# Altium PCB LineFollowerSensor_PCB.PcbDoc
Units mm, origin at the board's own origin, x right, y up, seen from the top; angles counter-clockwise.
Board outline 255.27 x 38.1 mm, 2 copper layers (Top Layer, Bottom Layer); 82 components, 80 nets, 345 pads, 23 vias.
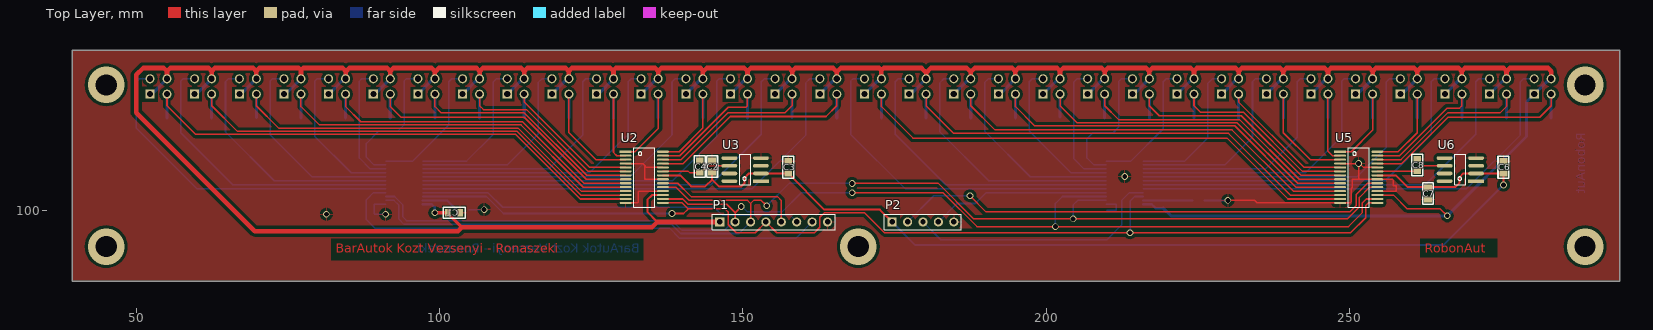
[diagram p0: Top Layer view]
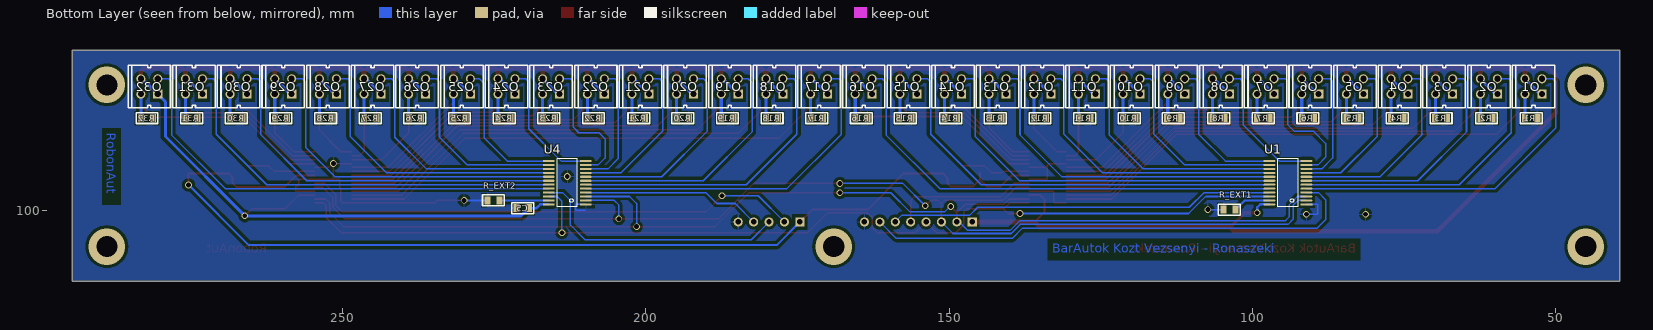
[diagram p1: Bottom Layer view, seen from below]
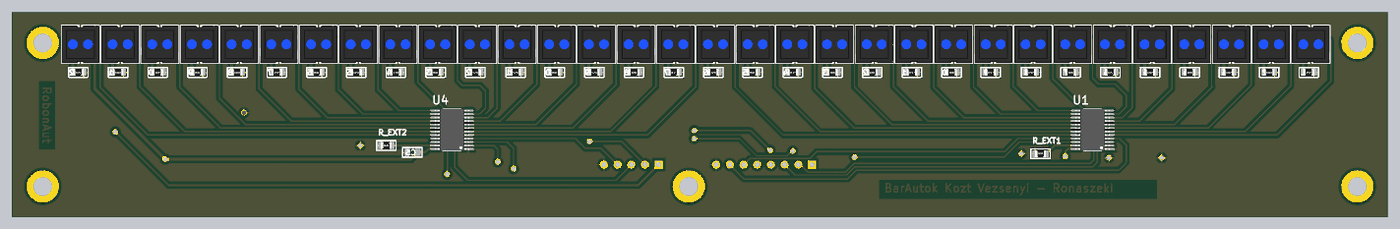
[diagram p2: 3D render of the assembled board from below, using the file's embedded part models]

## Layer stack, top to bottom
Top Layer: signal copper 0.0356
Dielectric: dielectric 0.32, FR-4, Dk 4.8
Bottom Layer: signal copper 0.0356

## Board outline
39.37,126.365 294.64,126.365 294.64,88.265 39.37,88.265

## Design rules (kind name [scope] priority, off if disabled: settings)
Clearance Clearance_polygon [Inpoly] p1: gap=0.5
Clearance [All] p2: gap=0.254
HoleSize [All] p1: absolutevalues=TRUE maxlimit=10 minlimit=0.7 maxpercent=80.000 minpercent=20.000
MinimumSolderMaskSliver [All] p1: minsoldermaskwidth=0.05
PolygonConnect [All] p1: connectstyle=Relief reliefconductorwidth=0.254 reliefentries=4 polygonreliefangle="90 Angle"
RoutingVias [All] p1: holewidth=0.8 width=1.1 viastyle="Through Hole" minholewidth=0.711 minwidth=1.1 maxholewidth=8 maxwidth=10
SilkscreenOverComponentPads [All] p1 off: minsilkscreentomaskgap=0.254
SolderMaskExpansion [All] p1: expansion=0.102
Width [All] p1: maxlimit=1 minlimit=0.25 preferedwidth=0.254 minimp=50.000000 maximp=50.000000 favimp=50.000000
25 further rules are at their usual default settings.

## Classes and differential pairs
net class SENSE_B[1..16]: SENSE_B1 SENSE_B2 SENSE_B3 SENSE_B4 SENSE_B5 SENSE_B6 SENSE_B7 SENSE_B8 SENSE_B9 SENSE_B10 SENSE_B11 SENSE_B12 SENSE_B13 SENSE_B14 SENSE_B15 SENSE_B16
net class SENSE_A[1..16]: SENSE_A1 SENSE_A2 SENSE_A3 SENSE_A4 SENSE_A5 SENSE_A6 SENSE_A7 SENSE_A8 SENSE_A9 SENSE_A10 SENSE_A11 SENSE_A12 SENSE_A13 SENSE_A14 SENSE_A15 SENSE_A16
net class LED_B[1..16]: LED_B1 LED_B2 LED_B3 LED_B4 LED_B5 LED_B6 LED_B7 LED_B8 LED_B9 LED_B10 LED_B11 LED_B12 LED_B13 LED_B14 LED_B15 LED_B16
net class LED_A[1..16]: LED_A1 LED_A2 LED_A3 LED_A4 LED_A5 LED_A6 LED_A7 LED_A8 LED_A9 LED_A10 LED_A11 LED_A12 LED_A13 LED_A14 LED_A15 LED_A16

## Components (designator, comment, footprint, x,y, rotation, side; value= is the part's Value field where it differs from the comment)
C1 "100nF" FP_0805_CAP_085 102.362,99.568 r180 top
C2 "100nF" FP_0805_CAP_085 144.907,107.188 r270 top
C3 "100nF" FP_0805_CAP_085 157.48,107.061 r270 top
C4 "100nF" FP_0805_CAP_085 142.875,107.188 r270 top
C5 "100nF" FP_0805_CAP_085 220.345,100.33 r180 bottom
C6 "100nF" FP_0805_CAP_085 275.463,107.061 r270 top
C7 "100nF" FP_0805_CAP_085 263.017,102.743 r90 top
C8 "100nF" FP_0805_CAP_085 261.239,107.442 r270 top
O1 "CNY70" FP_CNY70 53.594,120.396 r0 bottom
O2 "CNY70" FP_CNY70 60.96,120.396 r0 bottom
O3 "CNY70" FP_CNY70 68.326,120.396 r0 bottom
O4 "CNY70" FP_CNY70 75.692,120.396 r0 bottom
O5 "CNY70" FP_CNY70 83.058,120.396 r0 bottom
O6 "CNY70" FP_CNY70 90.424,120.396 r0 bottom
O7 "CNY70" FP_CNY70 97.79,120.396 r0 bottom
O8 "CNY70" FP_CNY70 105.156,120.396 r0 bottom
O9 "CNY70" FP_CNY70 112.522,120.396 r0 bottom
O10 "CNY70" FP_CNY70 119.888,120.396 r0 bottom
O11 "CNY70" FP_CNY70 127.254,120.396 r0 bottom
O12 "CNY70" FP_CNY70 134.62,120.396 r0 bottom
O13 "CNY70" FP_CNY70 141.986,120.396 r0 bottom
O14 "CNY70" FP_CNY70 149.352,120.396 r0 bottom
O15 "CNY70" FP_CNY70 156.718,120.396 r0 bottom
O16 "CNY70" FP_CNY70 164.084,120.396 r0 bottom
O17 "CNY70" FP_CNY70 171.45,120.396 r0 bottom
O18 "CNY70" FP_CNY70 178.816,120.396 r0 bottom
O19 "CNY70" FP_CNY70 186.182,120.396 r0 bottom
O20 "CNY70" FP_CNY70 193.548,120.396 r0 bottom
O21 "CNY70" FP_CNY70 200.914,120.396 r0 bottom
O22 "CNY70" FP_CNY70 208.28,120.396 r0 bottom
O23 "CNY70" FP_CNY70 215.646,120.396 r0 bottom
O24 "CNY70" FP_CNY70 223.012,120.396 r0 bottom
O25 "CNY70" FP_CNY70 230.378,120.396 r0 bottom
O26 "CNY70" FP_CNY70 237.744,120.396 r0 bottom
O27 "CNY70" FP_CNY70 245.11,120.396 r0 bottom
O28 "CNY70" FP_CNY70 252.476,120.396 r0 bottom
O29 "CNY70" FP_CNY70 259.842,120.396 r0 bottom
O30 "CNY70" FP_CNY70 267.208,120.396 r0 bottom
O31 "CNY70" FP_CNY70 274.574,120.396 r0 bottom
O32 "CNY70" FP_CNY70 281.94,120.396 r0 bottom
P1 "Header 8" HDR1X8 146.177,98.044 r0 top
P2 "Header 5" HDR1X5 174.625,98.044 r0 top
R1 "10K" FP_0805_RES 53.975,115.189 r180 bottom
R2 "10K" FP_0805_RES 61.341,115.189 r0 bottom
R3 "10K" FP_0805_RES 68.834,115.189 r0 bottom
R4 "10K" FP_0805_RES 76.073,115.189 r0 bottom
R5 "10K" FP_0805_RES 83.439,115.189 r0 bottom
R6 "10K" FP_0805_RES 90.805,115.189 r0 bottom
R7 "10K" FP_0805_RES 98.171,115.189 r0 bottom
R8 "10K" FP_0805_RES 105.537,115.189 r0 bottom
R9 "10K" FP_0805_RES 113.03,115.189 r0 bottom
R10 "10K" FP_0805_RES 120.269,115.189 r0 bottom
R11 "10K" FP_0805_RES 127.635,115.189 r0 bottom
R12 "10K" FP_0805_RES 135.001,115.189 r0 bottom
R13 "10K" FP_0805_RES 142.367,115.189 r0 bottom
R14 "10K" FP_0805_RES 149.733,115.189 r0 bottom
R15 "10K" FP_0805_RES 157.226,115.189 r0 bottom
R16 "10K" FP_0805_RES 164.465,115.189 r0 bottom
R17 "10K" FP_0805_RES 171.831,115.189 r180 bottom
R18 "10K" FP_0805_RES 179.197,115.189 r0 bottom
R19 "10K" FP_0805_RES 186.563,115.189 r0 bottom
R20 "10K" FP_0805_RES 193.929,115.189 r0 bottom
R21 "10K" FP_0805_RES 201.168,115.189 r0 bottom
R22 "10K" FP_0805_RES 208.661,115.189 r0 bottom
R23 "10K" FP_0805_RES 216.027,115.189 r0 bottom
R24 "10K" FP_0805_RES 223.393,115.189 r0 bottom
R25 "10K" FP_0805_RES 230.759,115.189 r0 bottom
R26 "10K" FP_0805_RES 238.125,115.189 r0 bottom
R27 "10K" FP_0805_RES 245.491,115.189 r0 bottom
R28 "10K" FP_0805_RES 252.857,115.189 r0 bottom
R29 "10K" FP_0805_RES 260.223,115.189 r0 bottom
R30 "10K" FP_0805_RES 267.589,115.189 r0 bottom
R31 "10K" FP_0805_RES 274.955,115.189 r0 bottom
R32 "10K" FP_0805_RES 282.321,115.189 r0 bottom
R_EXT1 "1R5" FP_0805_RES 103.759,100.076 r180 bottom
R_EXT2 "1R5" FP_0805_RES 225.171,101.6 r180 bottom
U1 "STP16CP05" TSSOP24 94.107,104.521 r0 bottom
U2 "AD7490" TSSOP28 133.731,105.41 r0 top
U3 "ADR421" SOIC8 150.368,106.68 r180 top
U4 "STP16CP05" TSSOP24 212.979,104.521 r0 bottom
U5 "AD7490" TSSOP28 251.587,105.41 r0 top
U6 "ADR421" SOIC8 268.351,106.68 r180 top

## Footprints (in the part's own frame and the unit in brackets; to place one, negate y for a bottom-side part, rotate by r counter-clockwise, add the part's x,y. Pads: shape width x height; smd on the part's side, far side on the other; paste and mask are expansions set on the pad)
FP_0805_CAP_085 [mm] "0805 kapacitás YAGEO 0.85mm magas"
  rect 1x1.3 smd: 1(-1,0) 2(1,0)
  silkscreen extent -1.8,-0.9 1.8,0.9, body extent -1,-0.64 1.03,0.64, height 0.85
FP_0805_RES [mm] "0805 ellenállás"
  rect 1x1.3 smd: 1(-1,0) 2(1,0)
  silkscreen extent -1.8,-0.9 1.8,0.9, body extent -1,-0.62 1,0.63, height 0.62
FP_CNY70 [mm] "Optoérzékelõ"
  rect 1.5x1.5 hole 1: A(-1.4,1.27)
  round 1.5 hole 1: C(1.4,-1.27) E(1.4,1.27) K(-1.4,-1.27)
  silkscreen extent -3.5,-3.5 3.5,3.5, body extent -3.5,-3.5 3.5,3.5, height 6
HDR1X5 [mm] "Connector; Header; 5 Position"
  rect 1.5x1.5 hole 0.9: 1(0,0)
  round 1.5 hole 0.9: 2(2.54,0) 3(5.08,0) 4(7.62,0) 5(10.16,0)
  silkscreen extent -1.27,-1.27 11.43,1.27
HDR1X8 [mm] "Connector; Header; 8 Position"
  rect 1.5x1.5 hole 0.9: 1(0,0)
  round 1.5 hole 0.9: 2(2.54,0) 3(5.08,0) 4(7.62,0) 5(10.16,0) 6(12.7,0) 7(15.24,0) 8(17.78,0)
  silkscreen extent -1.27,-1.27 19.05,1.27
SOIC8 [mm] "SOIC, 8-Leads, Body 5,0x4,0mm (max), Pitch 1,27mm, IPC Medium Density"
  rect 2.6x0.6 smd: 1(-2.6,1.905)
  oval 2.6x0.6 smd: 2(-2.6,0.635) 3(-2.6,-0.635) 4(-2.6,-1.905) 5(2.6,-1.905) 6(2.6,-0.635) 7(2.6,0.635) 8(2.6,1.905)
  silkscreen extent -0.9,-2.5 0.9,2.5, body extent -3.01,-2.5 3.01,2.5, height 1.75
TSSOP24 [mm] "TSOP, 24-Leads, Body 7,9x4,5mm (max), Pitch 0,65mm, IPC Medium Density"
  rect 1.95x0.35 smd: 1(-3.05,3.575)
  oval 1.95x0.35 smd: 2(-3.05,2.925) 3(-3.05,2.275) 4(-3.05,1.625) 5(-3.05,0.975) 6(-3.05,0.325) 7(-3.05,-0.325) 8(-3.05,-0.975) 9(-3.05,-1.625) 10(-3.05,-2.275) 11(-3.05,-2.925) 12(-3.05,-3.575) 13(3.05,-3.575) 14(3.05,-2.925) 15(3.05,-2.275) 16(3.05,-1.625) 17(3.05,-0.975) 18(3.05,-0.325) 19(3.05,0.325) 20(3.05,0.975) 21(3.05,1.625) 22(3.05,2.275) 23(3.05,2.925) 24(3.05,3.575)
  silkscreen extent -1.68,-3.95 1.68,3.95, body extent -3.23,-3.95 3.23,3.95, height 1.25
TSSOP28 [mm] "TSOP, 28-Leads, Body 9,8x4,5mm (max), Pitch 0,65mm, IPC Medium Density"
  rect 1.95x0.35 smd: 1(-3.075,4.225)
  oval 1.95x0.35 smd: 2(-3.075,3.575) 3(-3.075,2.925) 4(-3.075,2.275) 5(-3.075,1.625) 6(-3.075,0.975) 7(-3.075,0.325) 8(-3.075,-0.325) 9(-3.075,-0.975) 10(-3.075,-1.625) 11(-3.075,-2.275) 12(-3.075,-2.925) 13(-3.075,-3.575) 14(-3.075,-4.225) 15(3.075,-4.225) 16(3.075,-3.575) 17(3.075,-2.925) 18(3.075,-2.275) 19(3.075,-1.625) 20(3.075,-0.975) 21(3.075,-0.325) 22(3.075,0.325) 23(3.075,0.975) 24(3.075,1.625) 25(3.075,2.275) 26(3.075,2.925) 27(3.075,3.575) 28(3.075,4.225)
  silkscreen extent -1.7,-4.9 1.7,4.9, body extent -3.23,-4.9 3.23,4.9, height 1.35

## Part data
C1 C2 C3 C4 C5 C6 C7 C8: library part CAP_100nF, "YAGEO Ceramic Capacitor"
O1 O2 O3 O4 O5 O6 O7 O8 O9 O10 O11 O12 O13 O14 O15 O16 O17 O18 O19 O20 O21 O22 O23 O24 O25 O26 O27 O28 O29 O30 O31 O32: "Optoérzékelõ, CNY70"
P1: "Header, 8-Pin"
P2: "Header, 5-Pin"
R1 R2 R3 R4 R5 R6 R7 R8 R9 R10 R11 R12 R13 R14 R15 R16 R17 R18 R19 R20 R21 R22 R23 R24 R25 R26 R27 R28 R29 R30 R31 R32: library part RES_10K, "YAGEO SMD RESISTOR"
R_EXT1 R_EXT2: library part RES_1R5, "YAGEO SMD RESISTOR"
U1 U4: "16 channel constant current LED driver"
U2 U5: "16 channel analog digital converter"
U3 U6: "Reference voltage generator"

## Via types
v1: diameter 1.1, hole 0.8, Top Layer to Bottom Layer, 18 vias
v2: diameter 6, hole 3.5, Top Layer to Bottom Layer, 5 vias

## Nets (pads, with @x,y where several pads share a name; then routed paths per layer and width w, separated by ;. In a path a pad name is that pad's centre, name@x,y a point inside that pad or via, vN(x,y) a via of type N, cw(c..) or ccw(c..) an arc to the next point about the centre after c; other vN are vias at no path point)
3V3: C1.2 C5.2 O1.A O1.C O2.A O2.C O3.A O3.C O4.A O4.C O5.A O5.C O6.A O6.C O7.A O7.C O8.A O8.C O9.A O9.C O10.A O10.C O11.A O11.C O12.A O12.C O13.A O13.C O14.A O14.C O15.A O15.C O16.A O16.C O17.A O17.C O18.A O18.C O19.A O19.C O20.A O20.C O21.A O21.C O22.A O22.C O23.A O23.C O24.A O24.C O25.A O25.C O26.A O26.C O27.A O27.C O28.A O28.C O29.A O29.C O30.A O30.C O31.A O31.C O32.A O32.C P1.1 U1.24 U2.17 U4.24 U5.17 | length 630.5
  Top Layer w0.254: U5.17 257.306,102.485 259.588,100.203 265.049,100.203 v1(266.192,99.06)
  Top Layer w0.33: C1.2@101.362,99.425 C1.2 ; 135.89,98.044 134.239,99.695 134.239,101.727 134.997,102.485 U2.17
  Top Layer w0.508: v1(99.187,99.568) C1.2 ; C1.2@101.362,99.425 103.632,97.155
  Top Layer w0.762: O1.C 54.994,122.933 ; O2.C 62.36,122.933 ; O3.C 69.726,122.933 ; O4.C 77.092,123.06 ; O5.C 84.458,122.933 ; O6.C 91.824,122.933 ; O7.C 99.19,122.933 ; O8.C 106.556,122.933 ; O9.C 113.922,122.933 ; O10.C 121.288,122.933 ; O12.C 136.02,122.933 ; P1.1 135.89,98.044 135.001,97.155 103.632,97.155 102.997,96.52 69.469,96.52 49.911,116.078 49.911,122.301 49.914,122.301 51.054,123.441 54.486,123.441 54.994,122.933 ; O14.C 150.752,122.933 ; O15.C 158.118,122.933 ; O16.C 165.484,122.806 ; O17.C 172.85,123.06 ; O18.C 180.216,122.679 ; O19.C 187.582,122.806 ; O20.C 194.948,122.933 ; O21.C 202.314,122.933 ; O22.C 209.68,122.933 ; O23.C 217.046,122.933 ; O24.C 224.412,122.933 ; O25.C 231.778,122.933 ; O26.C 239.144,122.933 ; O27.C 246.51,122.933 ; O28.C 253.876,122.933 ; O29.C 261.242,122.933 ; O30.C 268.608,122.933 ; O31.C 275.974,122.933 ; O32.C 283.34,122.933 282.835,123.438 276.479,123.438 275.974,122.933 ; 54.994,122.933 55.499,123.438 61.855,123.438 62.36,122.933 ; 62.36,122.933 62.865,123.438 69.221,123.438 69.726,122.933 ; 69.726,122.933 70.231,123.438 76.714,123.438 77.092,123.06 ; 77.092,123.06 77.47,123.438 83.953,123.438 84.458,122.933 ; 84.458,122.933 84.579,122.933 85.09,123.444 91.313,123.444 91.824,122.933 ; 91.824,122.933 92.329,123.438 98.685,123.438 99.19,122.933 ; 99.19,122.933 99.311,122.933 99.822,123.444 106.045,123.444 106.556,122.933 ; 106.556,122.933 107.061,123.438 113.417,123.438 113.922,122.933 ; 113.922,122.933 114.427,123.438 120.783,123.438 121.288,122.933 ; 121.288,122.933 121.288,122.939 121.793,123.444 128.143,123.444 128.651,122.936 ; 128.651,122.936 128.651,121.669 O11.C 128.654,122.933 128.651,122.936 ; 128.651,122.936 128.651,123.063 129.032,123.444 135.509,123.444 136.02,122.933 ; 136.02,122.933 136.525,123.438 143.008,123.438 143.386,123.06 143.386,122.812 ; 143.386,122.812 143.383,122.809 143.383,121.669 O13.C 143.386,122.812 ; 143.386,122.812 144.018,123.444 150.241,123.444 150.752,122.933 ; 150.752,122.933 151.263,123.444 157.607,123.444 158.118,122.933 ; 158.118,122.933 158.623,123.438 164.852,123.438 165.484,122.806 ; 165.484,122.806 166.116,123.438 172.472,123.438 172.85,123.06 ; 172.85,123.06 173.234,123.444 179.451,123.444 180.216,122.679 ; 180.216,122.679 180.975,123.438 186.95,123.438 187.582,122.806 ; 187.582,122.806 188.22,123.444 194.437,123.444 194.948,122.933 ; 194.948,122.933 195.453,123.438 201.809,123.438 202.314,122.933 ; 202.314,122.933 202.314,122.939 202.819,123.444 209.169,123.444 209.68,122.933 ; 209.68,122.933 210.185,123.438 216.541,123.438 217.046,122.933 ; 217.046,122.933 217.551,123.438 223.907,123.438 224.412,122.933 ; 224.412,122.933 224.917,123.438 231.273,123.438 231.778,122.933 ; 231.778,122.933 232.283,123.438 238.639,123.438 239.144,122.933 ; 239.144,122.933 239.649,123.438 246.005,123.438 246.51,122.933 ; 246.51,122.933 247.021,123.444 253.365,123.444 253.876,122.933 ; 253.876,122.933 254.381,123.438 260.737,123.438 261.242,122.933 ; 261.242,122.933 261.753,123.444 268.097,123.444 268.608,122.933 ; 268.608,122.933 269.119,123.444 275.463,123.444 275.974,122.933
  Bottom Layer w0.254: U1.24 U1.24@97.176,100.965 ; U4.24 U4.24@216.048,100.965
  Bottom Layer w0.381: U1.24 98.66,100.946 99.149,100.457 v1@99.149,99.606 ; U4.24 217.443,100.946 218.059,100.33 C5.2
  Bottom Layer w0.508: O1.A 52.454,119.126 O1.C ; O2.A 59.82,119.126 O2.C ; O3.A 67.186,119.126 O3.C ; O4.A 74.552,119.126 O4.C ; O5.A O5.C@84.198,121.666 ; O6.A@89.284,119.126 O6.C ; O7.A O7.C@98.93,121.666 ; O8.A O8.C@106.296,121.666 ; O9.A O9.C@113.662,121.666 ; O10.A O10.C@121.028,121.666 ; O11.A@126.114,119.126 O11.C ; O12.A O12.C@135.76,121.666 ; O13.A O13.C@143.126,121.666 ; O14.A O14.C@150.492,121.666 ; O15.A O15.C@157.858,121.666 ; O16.A O16.C@165.224,121.666 ; O17.A O17.C@172.59,121.666 ; O18.A@177.676,119.126 O18.C ; O19.A O19.C@187.322,121.666 ; O20.A@192.408,119.126 O20.C ; O21.A O21.C@202.054,121.666 ; O22.A O22.C@209.42,121.666 ; O23.A@214.506,119.126 O23.C ; C5.2 220.615,99.06 v1(266.192,99.06) 279.273,112.141 279.273,117.859 O32.A O32.C@283.08,121.666 ; O24.A O24.C@224.152,121.666 ; O25.A O25.C@231.518,121.666 ; O26.A O26.C@238.884,121.666 ; O27.A O27.C@246.25,121.666 ; O28.A@251.336,119.126 O28.C ; O29.A@258.702,119.126 O29.C ; O30.A O30.C@268.348,121.666 ; O31.A O31.C@275.714,121.666
  Bottom Layer w0.762: O2.C@62.1,121.666 O2.C ; O5.C@84.198,121.666 O5.C ; O6.A O6.A@89.284,119.126 ; O6.C@91.564,121.666 O6.C ; O7.C@98.93,121.666 O7.C ; O8.C@106.296,121.666 O8.C ; O9.C@113.662,121.666 O9.C ; O10.C@121.028,121.666 O10.C ; O11.A O11.A@126.114,119.126 ; O12.C@135.76,121.666 O12.C ; O13.C@143.126,121.666 O13.C ; O14.C@150.492,121.666 O14.C ; O15.C@157.858,121.666 O15.C ; O16.C@165.224,121.666 O16.C ; O17.C@172.59,121.666 O17.C ; O18.A O18.A@177.676,119.126 ; O19.C@187.322,121.666 O19.C ; O21.C@202.054,121.666 O21.C ; O22.C@209.42,121.666 O22.C ; O23.A O23.A@214.506,119.126 ; O24.C@224.152,121.666 O24.C ; O25.C@231.518,121.666 O25.C ; O26.C@238.884,121.666 O26.C ; O27.C@246.25,121.666 O27.C ; O29.A O29.A@258.702,119.126 ; O30.C@268.348,121.666 O30.C ; O31.C@275.714,121.666 O31.C ; O32.C@283.08,121.666 O32.C
5V: C2.2 C3.2 C6.2 C7.2 P2.1 U2.22 U3.2 U5.22 U6.2 | length 176.9
  Top Layer w0.254: C6.2@275.447,106.045 C6.2
  Top Layer w0.33: U2.22 139.629,105.735 141.462,103.902 143.78,103.902 144.907,105.029 ; C2.2 144.907,105.029 ; C3.2 C3.2@157.464,106.045 ; P2.1 172.593,100.076 163.433,100.076 C3.2@157.464,106.045 ; U5.22 257.683,105.735 259.643,103.775 267.478,103.775 268.224,104.521 268.224,105.41 268.859,106.045 U6.2 275.447,106.045 275.463,106.029 v1(275.463,104.14) ; 144.907,105.029 146.034,103.902 149.749,103.902 150.241,104.394 150.241,105.283 151.003,106.045 U3.2 C3.2@157.464,106.045
  Bottom Layer w0.33: P2.1 178.435,94.234 265.557,94.234 v1(275.463,104.14)
GND: C1.1 C2.1 C3.1 C4.1 C5.1 C6.1 C7.1 C8.1 P1.8 P2.5 R1.2 R2.1 R3.1 R4.1 R5.1 R6.1 R7.1 R8.1 R9.1 R10.1 R11.1 R12.1 R13.1 R14.1 R15.1 R16.1 R17.2 R18.1 R19.1 R20.1 R21.1 R22.1 R23.1 R24.1 R25.1 R26.1 R27.1 R28.1 R29.1 R30.1 R31.1 R32.1 R_EXT1.1 R_EXT2.1 U1.1 U2.4 U2.14 U2.18 U2.21 U2.24 U3.4 U4.1 U5.4 U5.14 U5.18 U5.21 U5.24 U6.4 | length 81.2
  Top Layer w0.254: U2.14 132.554,101.185 132.715,101.346 132.715,102.997 132.853,103.135 U2.18 ; U2.4 133.466,107.685 133.836,107.315 ; U2.21 133.787,105.085 133.787,107.266 133.836,107.315 ; U2.24 134.116,107.035 133.836,107.315 ; v1(229.997,101.6) 234.442,101.6 234.857,101.185 U5.14 250.156,101.185 250.317,101.346 250.317,103.49 250.515,103.688 250.515,105.085 251.714,105.085 ; U5.4 v1(251.576,107.685) ; U5.18 257.81,103.135 257.81,104.013 257.302,104.013 257.302,104.902 257.119,105.085 U5.21 251.714,105.085 ; U5.24 252.375,107.035 251.725,107.685 v1(251.576,107.685) ; v1(251.576,107.685) 251.576,105.223 251.714,105.085
  Bottom Layer w0.254: U1.1 89.173,100.946 89.173,99.422 89.281,99.314 v1(91.059,99.314) ; R_EXT1.1 v1(107.315,100.076) ; U4.1 211.563,100.946 211.563,99.968 210.039,99.968
  Bottom Layer w0.381: R_EXT2.1 v1(229.997,101.6)
  other v1: 81.28,99.314 212.979,105.537
LED_A1: O1.K U1.5 | length 55.4
  Bottom Layer w0.254: O1.K 50.419,121.666 49.911,121.158 49.911,113.538 59.903,103.546 U1.5
LED_A2: O2.K U1.6 | length 48.3
  Bottom Layer w0.254: O2.K 57.658,121.666 57.277,121.285 57.277,112.776 65.857,104.196 U1.6
LED_A3: O3.K U1.7 | length 40.5
  Bottom Layer w0.254: O3.K 65.151,121.666 64.643,121.158 64.643,112.903 72.7,104.846 U1.7
LED_A4: O4.K U1.8 | length 33.3
  Bottom Layer w0.254: 71.882,112.522 78.908,105.496 U1.8 ; 72.009,112.522 72.009,121.285 72.39,121.666 O4.K
LED_A5: O5.K U1.9 | length 25.8
  Bottom Layer w0.254: O5.K 79.756,121.666 79.375,121.285 79.375,112.141 85.37,106.146 U1.9
LED_A6: O6.K U1.10 | length 20.2
  Bottom Layer w0.254: O6.K 87.122,121.666 86.741,121.285 86.741,108.585 88.53,106.796 U1.10
LED_A7: O7.K U1.11 | length 23.1
  Bottom Layer w0.254: U1.11 89.15,107.446 87.884,108.712 87.884,110.998 89.916,113.03 93.091,113.03 94.107,114.046 94.107,121.285 94.488,121.666 O7.K
LED_A8: O8.K U1.12 | length 22.5
  Bottom Layer w0.254: U1.12 95.523,108.096 101.088,113.661 101.096,113.661 101.473,114.039 101.473,121.158 101.981,121.666 O8.K
LED_A9: O9.K U1.13 | length 24.6
  Bottom Layer w0.254: U1.13 101.581,108.096 104.413,108.096 108.839,112.522 108.839,121.158 109.347,121.666 O9.K
LED_A10: O10.K U1.14 | length 32.2
  Bottom Layer w0.254: U1.14 111.129,107.446 116.205,112.522 116.205,115.681 116.205,121.031 116.84,121.666 O10.K
LED_A11: O11.K U1.15 | length 40
  Bottom Layer w0.254: U1.15 117.972,106.796 123.571,112.395 123.571,115.443 123.571,121.158 124.079,121.666 O11.K
LED_A12: O12.K U1.16 | length 47.6
  Bottom Layer w0.254: U1.16 124.688,106.146 131.064,112.522 131.064,115.824 131.064,121.158 131.572,121.666 O12.K
LED_A13: O13.K U1.17 | length 55.2
  Bottom Layer w0.254: U1.17 131.404,105.496 ; 131.445,105.537 138.303,112.395 138.303,121.158 138.811,121.666 O13.K
LED_A14: O14.K U1.18 | length 63.1
  Bottom Layer w0.254: U1.18 138.359,104.846 138.367,104.838 145.669,112.141 145.669,121.285 146.05,121.666 O14.K
LED_A15: O15.K U1.19 | length 70.5
  Bottom Layer w0.254: U1.19 144.709,104.196 153.035,112.522 153.035,115.316 153.035,121.158 153.543,121.666 O15.K
LED_A16: O16.K U1.20 | length 78.3
  Bottom Layer w0.254: U1.20 151.552,103.546 160.401,112.395 160.401,121.031 161.036,121.666 O16.K O16.K@162.557,121.793
LED_B1: O17.K U4.5 | length 57.1
  Bottom Layer w0.254: O17.K 168.148,121.666 167.767,121.285 167.767,112.522 176.743,103.546 U4.5
LED_B2: O18.K U4.6 | length 49.4
  Bottom Layer w0.254: O18.K 175.641,121.666 175.133,121.158 175.133,112.522 183.459,104.196 U4.6
LED_B3: O19.K U4.7 | length 41.4
  Bottom Layer w0.254: O19.K 183.134,121.666 182.499,121.031 182.499,112.903 190.556,104.846 U4.7
LED_B4: O20.K U4.8 | length 33.7
  Bottom Layer w0.254: O20.K 190.5,121.666 189.865,121.031 189.865,113.03 197.399,105.496 U4.8
LED_B5: O21.K U4.9 | length 26.2
  Bottom Layer w0.254: O21.K 197.739,121.666 197.231,121.158 197.231,113.03 204.115,106.146 U4.9
LED_B6: O22.K U4.10 | length 21.2
  Bottom Layer w0.254: O22.K 205.105,121.666 204.597,121.158 204.597,108.458 206.259,106.796 U4.10
LED_B7: O23.K U4.11 | length 22.8
  Bottom Layer w0.254: U4.11 207.895,107.446 206.756,108.585 206.756,111.76 207.772,112.776 211.074,112.776 211.963,113.665 211.963,121.158 212.471,121.666 O23.K
LED_B8: O24.K U4.12 | length 21.8
  Bottom Layer w0.254: U4.12 214.014,108.096 219.329,113.411 219.329,121.158 219.837,121.666 O24.K
LED_B9: O25.K U4.13 | length 23.9
  Bottom Layer w0.254: U4.13 222.904,108.096 226.695,111.887 226.695,120.904 227.457,121.666 O25.K
LED_B10: O26.K U4.14 | length 31.6
  Bottom Layer w0.254: U4.14 229.493,107.446 234.061,112.014 234.061,121.158 234.569,121.666 O26.K
LED_B11: O27.K U4.15 | length 39.2
  Bottom Layer w0.254: U4.15 236.209,106.796 241.427,112.014 241.427,121.158 241.935,121.666 O27.K
LED_B12: O28.K U4.16 | length 46.8
  Bottom Layer w0.254: U4.16 242.798,106.146 248.793,112.141 248.793,121.285 249.174,121.666 O28.K
LED_B13: O29.K U4.17 | length 55.4
  Bottom Layer w0.254: U4.17 251.292,105.496 256.159,110.363 256.159,121.158 256.667,121.666 O29.K
LED_B14: O30.K U4.18 | length 61.9
  Bottom Layer w0.254: U4.18 255.976,104.846 263.525,112.395 263.525,121.158 264.033,121.666 O30.K
LED_B15: O31.K U4.19 | length 69.4
  Bottom Layer w0.254: U4.19 262.565,104.196 270.891,112.522 270.891,121.158 271.399,121.666 O31.K
LED_B16: O32.K U4.20 | length 77.1
  Bottom Layer w0.254: U4.20 269.408,103.546 278.257,112.395 278.257,121.158 278.765,121.666 O32.K
NetC4_2: C4.2 U2.23 U3.6 | length 11.5
  Top Layer w0.254: U2.23 141.011,106.385 141.208,106.188 C4.2 143.018,106.188 144.137,107.307 147.76,107.307 U3.6
NetC8_2: C8.2 U5.23 U6.6 | length 11.5
  Top Layer w0.254: U5.23 261.182,106.385 C8.2 261.382,106.442 262.255,107.315 U6.6
NetP1_2: P1.2 U1.3 U2.16 U4.3 U5.16 | length 202
  Top Layer w0.254: U2.16 140.056,101.835 140.926,100.965 147.32,100.965 148.717,99.568 ; P1.2 148.717,99.568 ; v1(149.733,100.584) 148.717,99.568 ; v1(168.021,102.87) 183.011,102.87 188.595,97.286 249.899,97.286 252.201,99.589 252.201,101.198 252.838,101.835 U5.16
  Bottom Layer w0.254: U1.3 92.528,102.246 93.853,100.921 93.853,98.933 94.503,98.283 138.318,98.283 139.954,96.647 146.939,96.647 148.336,98.044 P1.2 ; v1(149.733,100.584) 149.86,100.584 150.749,99.695 156.464,99.695 159.639,102.87 v1(168.021,102.87) ; v1(201.549,97.282) 201.549,101.092 202.703,102.246 U4.3
NetP1_3: P1.3 U1.2 U2.19 U4.2 U5.19 | length 202
  Top Layer w0.254: U2.19 138.945,103.785 141.137,101.593 150.756,101.593 151.257,101.092 ; P1.3 151.257,101.092 ; v1@153.67,100.965 153.035,101.6 151.765,101.6 151.257,101.092 ; v1(168.021,104.394) 182.245,104.394 188.087,98.552 v1(204.47,98.552) 249.682,98.552 ; 249.69,98.552 249.682,98.552 ; U5.19 254.636,103.759 253.365,103.759 251.693,102.087 251.693,100.563 249.682,98.552
  Bottom Layer w0.254: U1.2 92.46,101.596 93.218,100.838 93.218,98.526 94.107,97.637 97.663,97.637 ; 97.663,97.633 138.25,97.633 139.744,96.139 149.352,96.139 P1.3 ; v1@154.051,100.711 v1(153.924,100.711) 157.607,104.394 v1(168.021,104.394) ; v1(204.47,98.552) 204.47,100.838 205.228,101.596 U4.2
NetP1_4: P1.4 U1.22 U2.15 U4.22 U5.15 | length 182.4
  Top Layer w0.254: U2.15 139.988,101.185 140.97,100.203 ; v1(138.303,99.441) 140.208,99.441 140.97,100.203 ; 250.19,96.266 v1(213.868,96.266) 173.355,96.266 170.091,99.53 163.411,99.53 162.687,98.806 162.687,97.155 161.798,96.266 155.575,96.266 P1.4 152.019,96.266 148.896,96.266 147.586,97.576 147.586,98.516 147.59,98.52 147.59,99.679 147.066,100.203 140.97,100.203 ; 250.249,96.266 252.73,98.747 252.73,100.77 253.145,101.185 U5.15
  Bottom Layer w0.254: U1.22 107.685,102.246 110.49,99.441 v1(138.303,99.441) ; v1(213.868,96.266) 213.868,101.473 214.641,102.246 U4.22
NetP1_5: P1.5 U2.20 | length 24.3
  Top Layer w0.254: U2.20 139.256,104.435 141.456,102.235 155.702,102.235 156.337,101.6 P1.5
NetP1_6: P1.6 U1.21 | length 63.7
  Bottom Layer w0.254: U1.21 107.924,102.896 110.363,100.457 144.383,100.457 145.288,100.457 146.57,99.175 157.746,99.175 P1.6
NetP1_7: P1.7 U1.4 | length 82.9
  Bottom Layer w0.254: U1.4 89.053,102.896 87.884,101.727 87.884,98.425 89.281,97.028 137.885,97.028 139.536,95.377 158.75,95.377 P1.7
NetP2_2: P2.2 U5.20 | length 83.4
  Top Layer w0.254: v1(187.452,102.362) 190.119,99.695 250.107,99.695 251.185,100.774 251.185,102.595 253.025,104.435 U5.20
  Bottom Layer w0.254: P2.2 181.483,102.362 v1(187.452,102.362)
NetP2_3: P2.3 U4.21 | length 43.1
  Bottom Layer w0.254: P2.3 182.626,95.123 210.058,95.123 212.471,97.536 212.471,101.6 213.767,102.896 U4.21
NetP2_4: P2.4 U4.4 | length 29.7
  Bottom Layer w0.254: P2.4 185.293,101.092 188.341,101.092 190.145,102.896 U4.4
NetR_EXT1_2: R_EXT1.2 U1.23 | length 6.2
  Bottom Layer w0.254: U1.23 U1.23@97.161,101.6 ; 101.219,101.596 101.239,101.596
  Bottom Layer w0.381: U1.23 101.219,101.596 ; 101.239,101.596 R_EXT1.2
NetR_EXT2_2: R_EXT2.2 U4.23 | length 8.1
  Bottom Layer w0.254: U4.23 U4.23@216.033,101.6 ; R_EXT2.2@224.167,101.596 R_EXT2.2
  Bottom Layer w0.381: U4.23 R_EXT2.2@224.167,101.596
SENSE_A1: O1.E R1.1 U2.13 | length 87.9
  Top Layer w0.254: O1.E 54.994,117.218 59.69,112.522 112.482,112.522 123.169,101.835 U2.13
  Bottom Layer w0.508: R1.1@54.994,115.208 O1.E
SENSE_A2: O2.E R2.2 U2.12 | length 80.2
  Top Layer w0.254: O2.E 62.36,117.218 66.548,113.03 112.693,113.03 123.238,102.485 U2.12
  Bottom Layer w0.508: R2.2@62.36,115.208 O2.E
SENSE_A3: O3.E R3.2 U2.11 | length 72.5
  Top Layer w0.254: O3.E 69.726,117.218 73.406,113.538 112.903,113.538 123.306,103.135 U2.11
  Bottom Layer w0.508: R3.2@69.726,115.297 O3.E
SENSE_A4: O4.E R4.2 U2.10 | length 65
  Top Layer w0.254: O4.E 77.092,117.091 80.137,114.046 113.411,114.046 123.672,103.785 U2.10
  Bottom Layer w0.508: R4.2@77.092,115.208 O4.E
SENSE_A5: O5.E R5.2 U2.9 | length 57.4
  Top Layer w0.254: O5.E 84.458,117.091 86.966,114.583 113.621,114.583 123.769,104.435 U2.9
  Bottom Layer w0.508: R5.2@84.458,115.208 O5.E
SENSE_A6: O6.E R6.2 U2.8 | length 49.8
  Top Layer w0.254: O6.E 91.824,117.091 93.595,115.32 113.919,115.32 124.154,105.085 U2.8
  Bottom Layer w0.508: R6.2@91.824,115.208 O6.E
SENSE_A7: O7.E R7.2 U2.7 | length 42.1
  Top Layer w0.254: O7.E 99.19,117.091 100.203,116.078 113.879,116.078 124.222,105.735 U2.7
  Bottom Layer w0.508: R7.2@99.19,115.208 O7.E
SENSE_A8: O8.E R8.2 U2.6 | length 34.4
  Top Layer w0.254: O8.E 106.556,117.218 107.188,116.586 114.3,116.586 124.501,106.385 U2.6
  Bottom Layer w0.508: R8.2@106.556,115.208 O8.E
SENSE_A9: O9.E R9.2 U2.5 | length 26.3
  Top Layer w0.254: O9.E 113.922,117.84 124.727,107.035 U2.5
  Bottom Layer w0.508: R9.2@113.922,115.297 O9.E
SENSE_A10: O10.E R10.2 U2.3 | length 21.5
  Top Layer w0.254: O10.E 121.288,112.781 125.734,108.335 U2.3
  Bottom Layer w0.508: R10.2@121.288,115.208 O10.E
SENSE_A11: O11.E R11.2 U2.2 | length 15.8
  Top Layer w0.254: O11.E 128.651,119.123 128.651,109.512 129.178,108.985 U2.2
  Bottom Layer w0.508: R11.2@128.654,115.208 O11.E
SENSE_A12: O12.E R12.2 U2.1 | length 16.5
  Top Layer w0.254: U2.1 132.207,109.635 136.02,113.448 O12.E
  Bottom Layer w0.508: R12.2@136.02,115.208 O12.E
SENSE_A13: O13.E R13.2 U2.28 | length 17.7
  Top Layer w0.254: U2.28 139.48,109.635 143.386,113.541 O13.E
  Bottom Layer w0.508: R13.2@143.386,115.208 O13.E
SENSE_A14: O14.E R14.2 U2.27 | length 23.2
  Top Layer w0.254: U2.27 139.592,108.985 147.574,116.967 150.495,116.967 150.752,117.224 O14.E
  Bottom Layer w0.508: R14.2@150.752,115.208 O14.E
SENSE_A15: O15.E R15.2 U2.26 | length 30.7
  Top Layer w0.254: U2.26 139.831,108.335 147.582,116.086 147.828,116.086 ; 147.828,116.082 156.976,116.082 158.118,117.224 O15.E
  Bottom Layer w0.508: R15.2@158.118,115.297 O15.E
SENSE_A16: O16.E R16.2 U2.25 | length 38.4
  Top Layer w0.254: U2.25 140.142,107.685 146.086,113.629 146.088,113.629 147.902,115.443 163.703,115.443 165.484,117.224 O16.E
  Bottom Layer w0.508: R16.2@165.484,115.208 O16.E
SENSE_B1: O17.E R17.1 U5.13 | length 87.9
  Top Layer w0.254: O17.E 172.85,117.091 178.054,111.887 229.87,111.887 239.903,101.854 ; 239.922,101.835 U5.13
  Bottom Layer w0.508: R17.1@172.85,115.208 O17.E
SENSE_B2: O18.E R18.2 U5.12 | length 80.2
  Top Layer w0.254: O18.E 180.216,117.218 184.785,112.649 230.124,112.649 240.284,102.489 ; 240.288,102.485 U5.12
  Bottom Layer w0.508: R18.2@180.216,115.208 O18.E
SENSE_B3: O19.E R19.2 U5.11 | length 72.6
  Top Layer w0.254: O19.E 187.582,117.218 191.579,113.221 230.695,113.221 240.781,103.135 U5.11
  Bottom Layer w0.508: R19.2@187.582,115.208 O19.E
SENSE_B4: O20.E R20.2 U5.10 | length 65
  Top Layer w0.254: O20.E 194.948,117.091 198.12,113.919 231.116,113.919 241.25,103.785 U5.10
  Bottom Layer w0.508: R20.2@194.948,115.208 O20.E
SENSE_B5: O21.E R21.2 U5.9 | length 57.2
  Top Layer w0.254: O21.E 202.314,117.218 205.105,114.427 231.527,114.427 241.519,104.435 U5.9
  Bottom Layer w0.508: R21.2@202.314,115.335 O21.E
SENSE_B6: O22.E R22.2 U5.8 | length 49.7
  Top Layer w0.254: O22.E 209.68,117.218 211.963,114.935 231.938,114.935 241.788,105.085 U5.8
  Bottom Layer w0.508: R22.2@209.68,115.208 O22.E
SENSE_B7: O23.E R23.2 U5.7 | length 42
  Top Layer w0.254: O23.E 217.046,117.218 218.694,115.57 232.223,115.57 242.058,105.735 U5.7
  Bottom Layer w0.508: R23.2@217.046,115.208 O23.E
SENSE_B8: O24.E R24.2 U5.6 | length 34.4
  Top Layer w0.254: O24.E 224.412,117.218 225.459,116.171 232.541,116.171 242.327,106.385 U5.6
  Bottom Layer w0.508: R24.2@224.412,115.208 O24.E
SENSE_B9: O25.E R25.2 U5.5 | length 26.4
  Top Layer w0.254: O25.E 231.775,119.123 231.775,117.856 242.596,107.035 U5.5
  Bottom Layer w0.508: R25.2@231.778,115.208 O25.E
SENSE_B10: O26.E R26.2 U5.3 | length 21.5
  Top Layer w0.254: O26.E 239.144,112.781 243.59,108.335 U5.3
  Bottom Layer w0.508: R26.2@239.144,115.208 O26.E
SENSE_B11: O27.E R27.2 U5.2 | length 15.6
  Top Layer w0.254: O27.E 246.51,109.725 247.25,108.985 U5.2
  Bottom Layer w0.508: R27.2@246.51,115.208 O27.E
SENSE_B12: O28.E R28.2 U5.1 | length 16.7
  Top Layer w0.254: U5.1 250.351,109.635 253.873,113.157 253.873,119.123 O28.E
  Bottom Layer w0.508: R28.2@253.876,115.208 O28.E
SENSE_B13: O29.E R29.2 U5.28 | length 18.2
  Top Layer w0.254: U5.28 258.08,109.635 ; 258.08,109.617 261.242,112.779 O29.E
  Bottom Layer w0.508: R29.2@261.242,115.208 O29.E
SENSE_B14: O30.E R30.2 U5.27 | length 23.2
  Top Layer w0.254: U5.27 258.318,108.985 266.173,116.84 268.224,116.84 268.608,117.224 O30.E
  Bottom Layer w0.508: R30.2@268.608,115.208 O30.E
SENSE_B15: O31.E R31.2 U5.26 | length 30.9
  Top Layer w0.254: U5.26 258.571,108.335 266.318,116.082 274.959,116.082 275.974,117.097 O31.E
  Bottom Layer w0.508: R31.2@275.974,115.208 O31.E
SENSE_B16: O32.E R32.2 U5.25 | length 38.4
  Top Layer w0.254: U5.25 258.688,107.685 266.319,115.316 281.432,115.316 283.34,117.224 O32.E
  Bottom Layer w0.508: R32.2@283.34,115.208 O32.E
pads on no net: U3.1 U3.3 U3.5 U3.7 U3.8 U6.1 U6.3 U6.5 U6.7 U6.8
copper on no net:
  other v2: 44.958,93.98 169.037,93.98 288.925,93.98 44.958,120.65 288.925,120.65

## Polygon pours and split planes (outlines as drawn)
GND on Top Layer "GND_plane_TOP" (solid, pour order 4): 39.497,126.238 294.513,126.238 294.513,88.392 39.497,88.392
GND on Bottom Layer "GND_plane_BOT" (solid, pour order 6): 39.497,126.238 294.513,126.238 294.513,88.392 39.497,88.392

## Other copper
Top Layer:
  text "BarAutok Kozt Vezsenyi - Ronaszeki" at 82.804,92.964 h1.52
  text "RobonAut" at 262.509,92.964 h1.52
Bottom Layer:
  text "RobonAut" at 288.925,112.776 h1.52 r90
  text "BarAutok Kozt Vezsenyi - Ronaszeki" at 132.969,92.964 h1.52

## Silkscreen, mask and mechanical layers (free items; w line width, h text height)
Top Solder:
  the board outline again, w0.254